# EAGLE board Own_RPi.Streamerboard.pro_v1.1_Final_AR (EAGLE 9.6.2)
REV: B
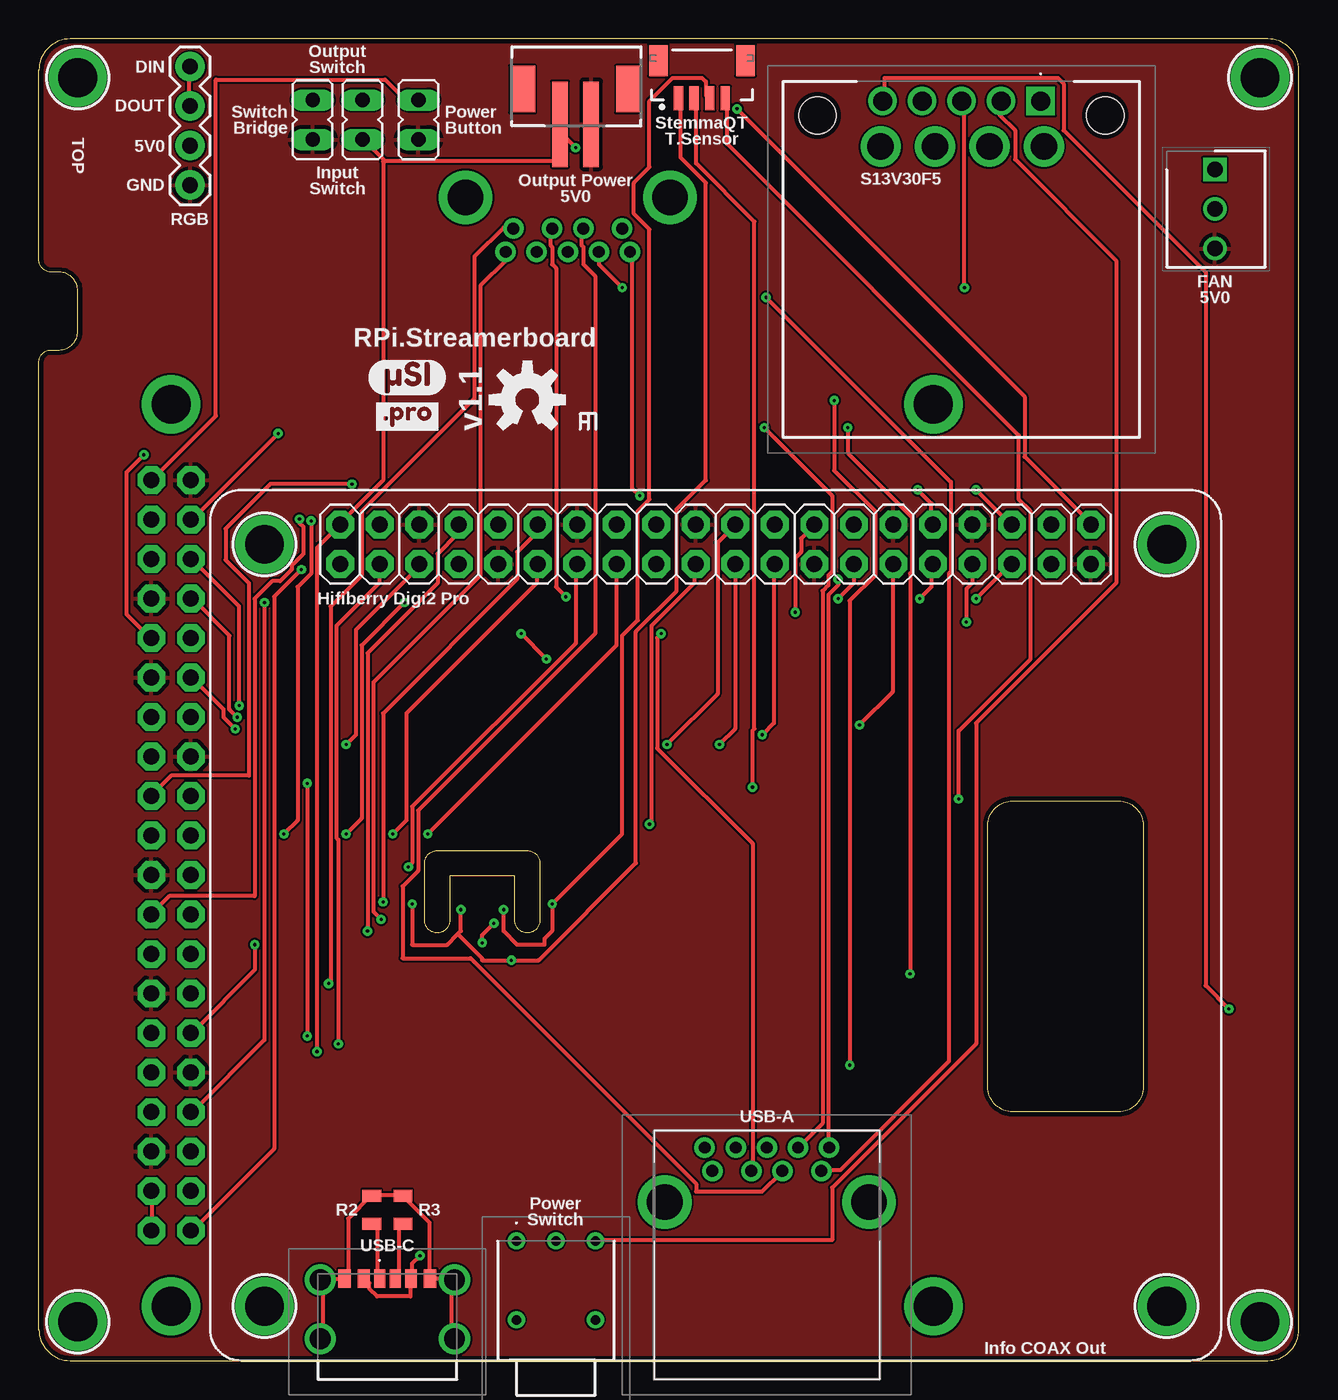
[diagram p0: board, top side]
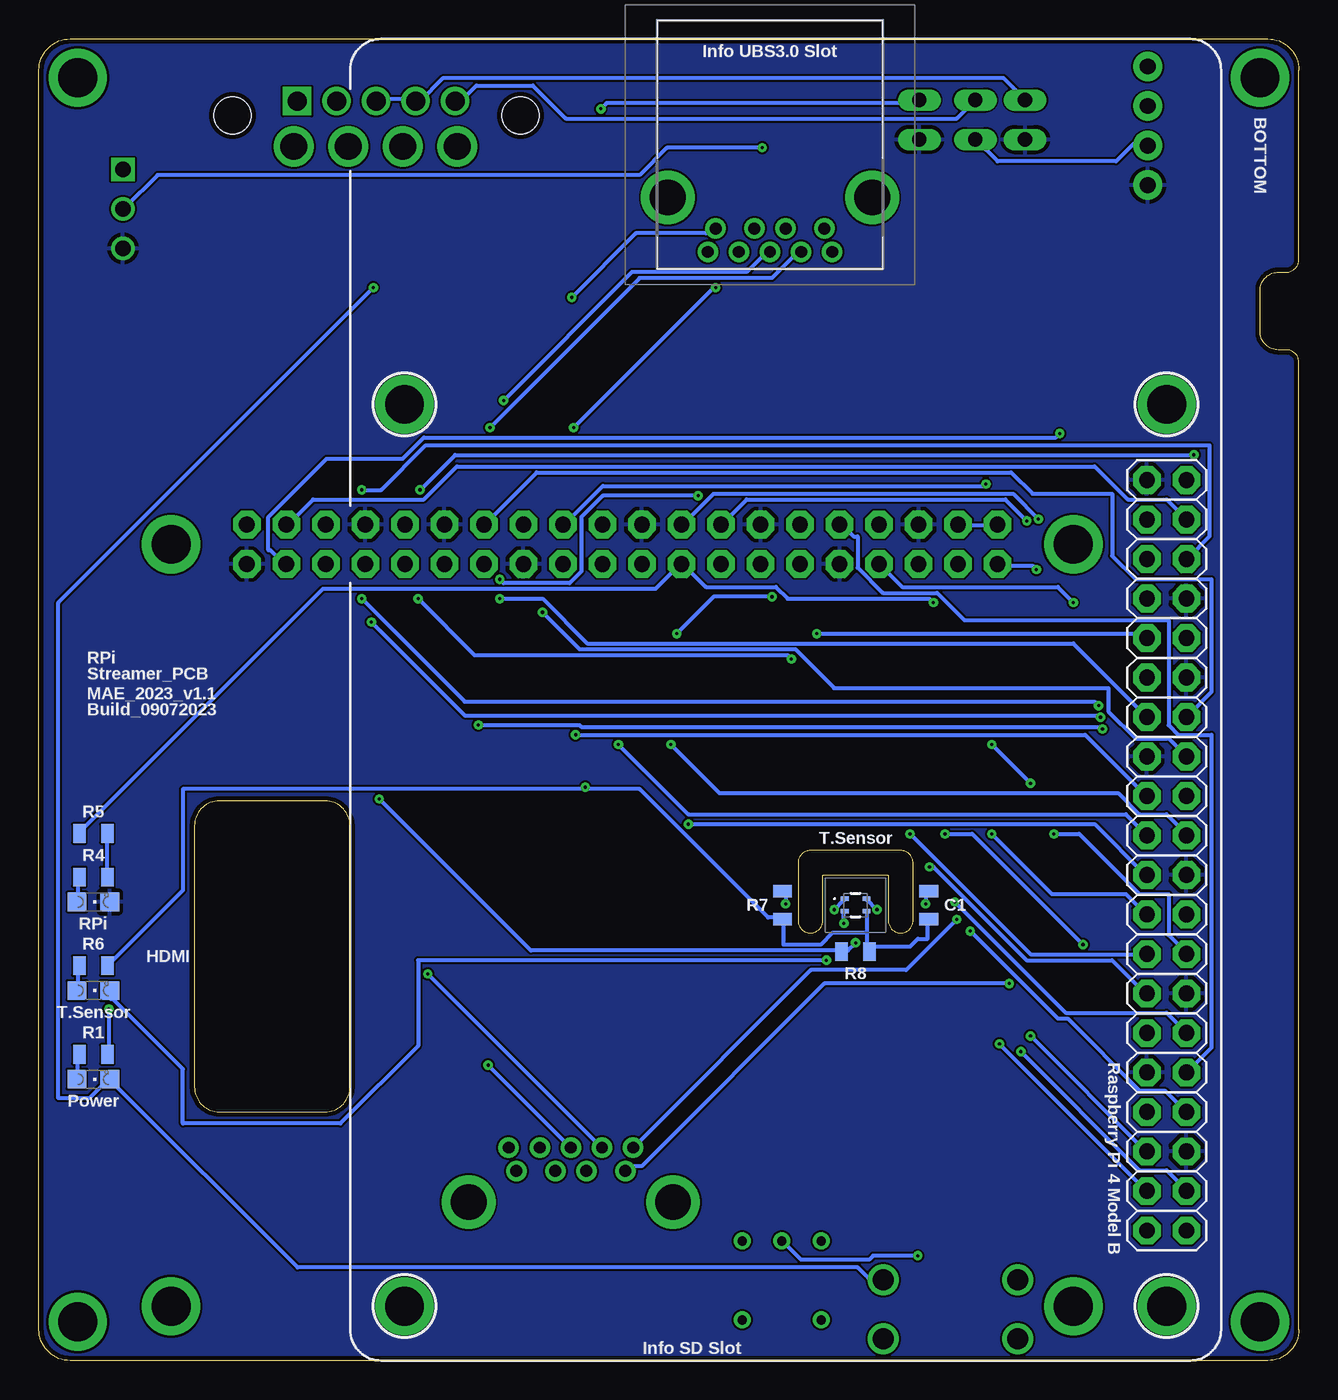
[diagram p1: board, bottom side, seen from below]

Size 81 x 85 mm. Coordinates in mm from the lower left corner, seen from the top.
Outline: 0,70.8 0,70.9 0,83 arc-90 2,85 79,85 arc-90 81,83 81,2 arc-90 79,0 2,0 arc-90 0,2 0,64.2 arc-90 0.8,65 1.3,65 arc90 2.5,66.2 2.5,68.8 arc90 1.3,70 0.8,70 arc-90 0,70.8
Outline: 69.4,16 62.6,16 arc-90 61,17.6 61,34.4 arc-90 62.6,36 69.4,36 arc-90 71,34.4 71,17.6 arc-90 69.4,16
Outline: 26.4,31.2 26.4,28.3 arc-90 25.6,27.5 arc-90 24.8,28.3 24.8,32 arc-90 25.6,32.8 31.4,32.8 arc-90 32.2,32 32.2,28.3 arc-90 31.4,27.5 arc-90 30.6,28.3 30.6,31.2 26.4,31.2
Copper layers (1*16): Top 0.035mm / dielectric 1.5mm / Bottom 0.035mm
Design rules "aisler_2_layer_complex": minimum track width 0.125mm, minimum drill 0.2mm, track to track 0.125mm, track to pad 0.125mm, pad to pad 0.125mm, via to via 0.125mm, smd to smd 0.125mm, copper to edge 0.3mm, drill to drill 0.25mm, minimum pad ring 0.2mm, minimum via ring 0.2mm, stop-mask expansion 0mil, vias tented up to drill 0mil, thermal gap 10mil
Net classes: 0 default: width 0.25 mm

## Footprints (pad centres in the part's own frame; a part is rotated, then mirrored left to right if it is on the bottom)
0805 = smd 0.8 x 1.2: 1 -0.9,0; 2 0.9,0
JST-2-SMD-VERT = smd 1 x 5.5: GND 1,-2; VCC -1,-2 | smd 1.6 x 3: P$1 -3.4,0.27; P$2 3.4,0.27
S13V30F5 = drill 1.22 pad 1.83 square: 1 0,0 | drill 1.22 pad 1.83: 2 2.54,0; 3 5.08,0; 4 7.62,0; 5 10.16,0 | drill 1.72 pad 2.58: 6 -0.21,2.92; 7 3.29,2.92; 8 6.79,2.92; 9 10.29,2.92 | hole 2.38: -4.15,0.93; 14.35,0.93
SHT45AD1BR2 = smd 0.5 x 0.3: 1 -0.7,0.4; 2 -0.7,-0.4; 3 0.7,-0.4; 4 0.7,0.4
USB4125GFA0190 = smd 0.7 x 1.2: A5 -0.5,3.08; B5 0.5,3.08 | smd 0.76 x 1.2: A9 1.52,3.08; B9 -1.52,3.08 | smd 0.8 x 1.2: A12 2.75,3.08; B12 -2.75,3.08 | drill 1.34 pad 2.01: MH1 -4.32,3; MH2 -4.32,-0.8; MH3 4.32,-0.8; MH4 4.32,3
AUY10053 = drill 0.77 pad 1.32: 1 0,0; 2 2,0; 3 4,0; 4 6,0; 5 8,0; 6 0.5,-1.5; 7 3,-1.5; 8 5,-1.5; 9 7.5,-1.5 | drill 2.3 pad 3.45: MH1 -2.57,-3.5; MH2 10.57,-3.5
SHDR3W82P0X254_1X3_747X635X818 = drill 1 pad 1.5 square: 1 0,0 | drill 1 pad 1.5: 2 2.54,0; 3 5.08,0
1X04 = drill 1.016 pad 1.88: 1 0,0; 2 2.54,0; 3 5.08,0; 4 7.62,0
JST04_1MM_VERT = smd 0.6 x 1.55: 1 -1.478,0.775; 2 -0.478,0.775; 3 0.522,0.775; 4 1.522,0.775 | smd 1.2 x 2: NC1 -2.778,3.2; NC2 2.822,3.2
2X20-BIG = drill 1.016 pad 1.778 octagon: 1 -24.13,-1.27; 2 -24.13,1.27; 3 -21.59,-1.27; 4 -21.59,1.27; 5 -19.05,-1.27; 6 -19.05,1.27; 7 -16.51,-1.27; 8 -16.51,1.27; 9 -13.97,-1.27; 10 -13.97,1.27; 11 -11.43,-1.27; 12 -11.43,1.27; 13 -8.89,-1.27; 14 -8.89,1.27; 15 -6.35,-1.27; 16 -6.35,1.27; 17 -3.81,-1.27; 18 -3.81,1.27; 19 -1.27,-1.27; 20 -1.27,1.27; 21 1.27,-1.27; 22 1.27,1.27; 23 3.81,-1.27; 24 3.81,1.27; 25 6.35,-1.27; 26 6.35,1.27; 27 8.89,-1.27; 28 8.89,1.27; 29 11.43,-1.27; 30 11.43,1.27; 31 13.97,-1.27; 32 13.97,1.27; 33 16.51,-1.27; 34 16.51,1.27; 35 19.05,-1.27; 36 19.05,1.27; 37 21.59,-1.27; 38 21.59,1.27; 39 24.13,-1.27; 40 24.13,1.27
JP1 = drill 0.914 long: 1 0,-1.27; 2 0,1.27
CHIPLED_0805 = smd 1.2 x 1.2: A 0,-1.05; C 0,1.05
GW12RHH = drill 0.6 pad 1.1: 4 0,0; 5 2.54,0; 6 5.08,0; MH1 0,-5.08; MH2 5.08,-5.08
MOUNTINGHOLE_2.5_PLATED = drill 2.5 pad 3.2: P$1 0,0

## Placement (x,y rotation side)
C1  0.1uF  [0805]  23.8,29.3 270 bottom
CN1  TinyS3  [JST-2-SMD-VERT]  34.5,81.5 0 top
IC1  S13V30F5  [S13V30F5]  64.4,81 180 top
IC2  SHT45-AD1B-R2  [SHT45AD1BR2]  28.5,29.3 0 bottom
J1  USB4125-GF-A-0190  [USB4125GFA0190]  22.4,2.2 0 top
J2  AU-Y1005-3  [AUY10053]  42.8,13.7 0 top
J3  AU-Y1005-3  [AUY10053]  30,71.3 180 bottom
J4  22-23-2031  [SHDR3W82P0X254_1X3_747X635X818]  75.6,76.6 270 top
J5  RGB  [1X04]  9.72,75.6 90 top
J8  StemmaQT  [JST04_1MM_VERT]  42.6,80.4 0 top
JP1  RPIx  [2X20-BIG]  8.5,32.5 90 bottom
JP2  COAX  [2X20-BIG]  43.5,52.5 0 top
JP3  [JP1]  17.6,79.8 180 top
JP4  [JP1]  20.8,79.8 180 top
JP5  [JP1]  24.4,79.8 0 top
ORANGE1  [CHIPLED_0805]  77.5,18.1 270 bottom
ORANGE2  [CHIPLED_0805]  77.5,23.8 270 bottom
R1  2K8  [0805]  77.5,19.7 180 bottom
R2  5K1  [0805]  21.4,9.7 90 top
R3  5K1  [0805]  23.4,9.7 90 top
R4  0K3  [0805]  77.5,31.1 180 bottom
R5  0K2  [0805]  77.5,33.9 0 bottom
R6  1K1  [0805]  77.5,25.4 180 bottom
R7  10K  [0805]  33.2,29.3 270 bottom
R8  10K  [0805]  28.5,26.3 0 bottom
S1  GW12RHH  [GW12RHH]  30.7,7.7 0 top
U$1  [.PRO_LARGE]  21.7,59.8 0 top
U$2  [OSHW-LOGO-M]  31.4,61.8 0 top
U$3  MOUNTINGHOLE2.5  [MOUNTINGHOLE_2.5_PLATED]  14.5,52.5 0 top
U$5  MOUNTINGHOLE2.5  [MOUNTINGHOLE_2.5_PLATED]  72.5,3.5 0 top
U$8  MOUNTINGHOLE2.5  [MOUNTINGHOLE_2.5_PLATED]  8.5,61.5 0 bottom
U$9  MOUNTINGHOLE2.5  [MOUNTINGHOLE_2.5_PLATED]  8.5,3.5 0 bottom
U$10  MOUNTINGHOLE2.5  [MOUNTINGHOLE_2.5_PLATED]  14.5,3.5 0 top
U$11  MOUNTINGHOLE2.5  [MOUNTINGHOLE_2.5_PLATED]  57.5,3.5 0 bottom
U$12  MOUNTINGHOLE2.5  [MOUNTINGHOLE_2.5_PLATED]  72.5,52.5 0 top
U$13  MOUNTINGHOLE2.5  [MOUNTINGHOLE_2.5_PLATED]  78.5,2.5 0 top
U$14  MOUNTINGHOLE2.5  [MOUNTINGHOLE_2.5_PLATED]  2.5,82.5 0 top
U$15  MOUNTINGHOLE2.5  [MOUNTINGHOLE_2.5_PLATED]  78.5,82.5 0 top
U$16  MOUNTINGHOLE2.5  [MOUNTINGHOLE_2.5_PLATED]  2.5,2.5 0 top
U$17  MOUNTINGHOLE2.5  [MOUNTINGHOLE_2.5_PLATED]  57.5,61.5 0 bottom
U$18  [µSI_LARGE]  21.2,62.1 0 top
WHITE  [CHIPLED_0805]  77.5,29.5 270 bottom

## Library data of the parts
C1 = SparkFun-Capacitors; PROD_ID: CAP-08064
CN1 = SparkFun-Connectors2
IC1 = S13V30F5; DESCRIPTION: 5V Step-Up/Step-Down Voltage Regulator; HEIGHT: 9.57mm; MANUFACTURER_NAME: Pololu; MANUFACTURER_PART_NUMBER: S13V30F5
IC2 = SHT45-AD1B-R2; ARROW_PART_NUMBER: SHT45-AD1B-R2; ARROW_PRICE-STOCK: https://www.arrow.com/en/products/sht45-ad1b-r2/sensirion-ag?region=nac; DESCRIPTION: 4 4th Generation, High-Accuracy, Ultra-Low-Power, 16-bit Relative Humidity and Temperature Sensor; HEIGHT: 0.59mm; MANUFACTURER_NAME: Sensirion; MANUFACTURER_PART_NUMBER: SHT45-AD1B-R2; MOUSER_PART_NUMBER: 403-SHT45-AD1B-R2; MOUSER_PRICE-STOCK: https://www.mouser.co.uk/ProductDetail/Sensirion/SHT45-AD1B-R2?qs=Znm5pLBrcAImXcmTJwn%2FTg%3D%3D
J1 = USB4125-GF-A-0190; DESCRIPTION: USB Connectors USB C Rec GF RA 6P SMT TH Stakes 1.9mm; HEIGHT: 3.41mm; MANUFACTURER_NAME: GCT (GLOBAL CONNECTOR TECHNOLOGY); MANUFACTURER_PART_NUMBER: USB4125-GF-A-0190; MOUSER_PART_NUMBER: 640-USB4125-GF-A-190; MOUSER_PRICE-STOCK: https://www.mouser.co.uk/ProductDetail/GCT/USB4125-GF-A-0190?qs=QNEnbhJQKvbCz4hEJBS24w%3D%3D
J2 J3 = AU-Y1005-3; ARROW_PART_NUMBER: AU-Y1005-3; ARROW_PRICE-STOCK: https://www.arrow.com/en/products/au-y1005-3/assmann-wsw-components-inc?region=nac; DESCRIPTION: CONN USB 3.0 R/A FMAL TYPE-A PCB; HEIGHT: 7.2mm; MANUFACTURER_NAME: ASSMANN WSW components GmbH; MANUFACTURER_PART_NUMBER: AU-Y1005-3
J4 = 22-23-2031; DESCRIPTION: 2.54mm,header,KK,vert,Sn,frictn lock,3w Molex KK 254 Series, Series Number 6373, 2.54mm Pitch 3 Way 1 Row Straight PCB Header, Through Hole, Solder Termination; HEIGHT: 8.18mm; MANUFACTURER_NAME: Molex; MANUFACTURER_PART_NUMBER: 22-23-2031; MOUSER_PART_NUMBER: 538-22-23-2031; MOUSER_PRICE-STOCK: https://www.mouser.co.uk/ProductDetail/Molex/22-23-2031?qs=ILqg114nvd41XyIAFDpXfw%3D%3D
J5 = SparkFun-Connectors2; PROD_ID: CONN-09696
J8 = SparkFun-Connectors2; PROD_ID: CONN-14483
JP1 JP2 ORANGE1 ORANGE2 WHITE = adafruit
JP3-JP5 = jumper
R1-R8 = SparkFun-Resistors
S1 = GW12RHH; ARROW_PART_NUMBER: GW12RHH; ARROW_PRICE-STOCK: https://www.arrow.com/en/products/gw12rhh/nkk-switches?region=nac; DESCRIPTION: NKK SWITCHES - GW12RHH - Rocker Switch, On-None-On, SPDT, Non Illuminated, Through Hole, Grey, GW Series; HEIGHT: 5.4mm; MANUFACTURER_NAME: NKK Switches; MANUFACTURER_PART_NUMBER: GW12RHH; MOUSER_PART_NUMBER: 633-GW12RHH; MOUSER_PRICE-STOCK: https://www.mouser.co.uk/ProductDetail/NKK-Switches/GW12RHH?qs=4EnmSMTL3HPCG3meE6aDvQ%3D%3D
U$1 U$18 = own_Label_PCB
U$2 = SparkFun-Aesthetics
U$3 U$5 U$8-U$17 = microbuilder; BOM: EXCLUDE

## Nets
3V3: JP1.18 JP2.17 R5.1
DIN_DOUT: J5.3 J5.4
EN: IC1.1
GND: IC1.3 IC1.4 J1.A12 J1.B12 J1.MH1 J1.MH2 J1.MH3 J1.MH4 JP3.1 ORANGE1.C R2.2 R3.2
N$1: ORANGE1.A R1.2
N$2: R4.1 R5.2
N$3: J1.B5 R3.1
N$4: J1.A5 R2.1
N$5: J2.4 J3.4
N$6: ORANGE2.A R6.2
N$7: R4.2 WHITE.A
N$10: C1.2 IC2.3 J8.2 R6.1 R7.2 R8.2
N$13: C1.1 IC2.4 J8.1 ORANGE2.C
N$14: IC2.2 J8.4 R8.1
N$15: J2.6 J3.6
N$16: IC2.1 J8.3 R7.1
N$17: J2.5 J3.5
N$19: J2.3 J3.3
N$20: J2.2 J3.2
N$21: J2.1 J3.1
N$22: J2.9 J3.9
N$23: J2.8 J3.8
N$24: J2.7 J3.7
PIN1: JP1.2 JP2.1
PIN3: JP1.4 JP2.3
PIN5: JP1.6 JP2.5
PIN7: JP1.8 JP2.7
PIN8: JP1.7 JP2.8
PIN10: JP1.9 JP2.10
PIN11: JP1.12 JP2.11
PIN12: JP1.11 JP2.12
PIN13: JP1.14 JP2.13
PIN15: JP1.16 JP2.15
PIN16: JP1.15 JP2.16
PIN18: JP1.17 JP2.18
PIN19: JP1.20 JP2.19
PIN21: JP1.22 JP2.21
PIN22: JP1.21 JP2.22
PIN23: JP1.24 JP2.23
PIN24: JP1.23 JP2.24
PIN26: JP1.25 JP2.26
PIN27: JP1.28 JP2.27
PIN28: JP1.27 JP2.28
PIN29: JP1.30 JP2.29
PIN31: JP1.32 JP2.31
PIN32: JP1.31 JP2.32
PIN33: JP1.34 JP2.33
PIN35: JP1.36 JP2.35
PIN36: JP1.35 JP2.36
PIN37: JP1.38 JP2.37
PIN38: JP1.37 JP2.38
PIN40: JP1.39 JP2.40 JP5.2
USB_5V0: CN1.VCC J4.2 J5.2 JP1.1 JP1.3 JP2.2 JP2.4 JP4.2
USB_GND: CN1.GND J4.3 J5.1 JP1.5 JP1.10 JP1.13 JP1.19 JP1.26 JP1.29 JP1.33 JP1.40 JP2.6 JP2.9 JP2.14 JP2.20 JP2.25 JP2.30 JP2.34 JP2.39 JP3.2 JP5.1 WHITE.C
VBUS_VIN: J1.A9 J1.B9 S1.5
VIN: IC1.2 S1.6
VOUT: IC1.5 JP4.1 R1.1

## Tracks (layer width: path | path; a pad name or v marks a point on that pad's centre or on a via)
3V3  (via drill 0.2)
  Top 0.25: v19.75,33.88 20.75,34.88 20.75,46 v23.5,48.75
  Bottom 0.25: R5.1 78.38,34 62.75,49.62 41.38,49.62 39.88,51.12 39.75,51.12 JP2.17 39.62,51.12 39.5,51.12 38.12,49.75 33.62,49.75 32.88,49 23.75,49 v23.5,48.75 | v19.75,33.88 15.88,30 11.12,30 9.88,28.75 JP1.18
DIN_DOUT
  Top 0.25: J5.3 9.62,80.75 9.62,83.12 J5.4
GND  (via drill 0.2)
  Top 0.25: 18.25,5.25 18.12,5.25 J1.MH1 18.25,5.25 | 18.25,5.25 19.62,5.25 J1.B12 19.75,5.38 19.88,5.5 19.88,9.12 21.38,10.62 R2.2 21.5,10.62 23.38,10.62 R3.2 25.12,8.88 25.12,5.38 J1.A12 25.25,5.25 26.5,5.25 | 18.25,5.25 18.25,1.62 18.12,1.5 J1.MH2 | 26.5,5.25 26.62,5.25 J1.MH4 26.5,5.25 | 26.5,5.25 26.5,1.62 26.62,1.5 J1.MH3 | v59.5,69 59.5,80.88 59.38,81 IC1.3
  Bottom 0.25: JP3.1 17.62,81.12 19,82.5 55,82.5 56.5,81 IC1.4 56.5,81.12 59.12,81.12 59.25,81 IC1.3 | J1.MH4 26.75,5.25 27.62,5.25 28.38,6 64.38,6 76.38,18 ORANGE1.C 76.5,18 76.62,18 77.75,16.88 79.75,16.88 79.75,48.75 v59.5,69
N$1
  Bottom 0.25: R1.2 78.5,19.62 78.5,18.12 ORANGE1.A
N$2
  Bottom 0.25: R4.1 76.62,31.12 76.62,33.88 R5.2
N$3
  Top 0.25: J1.B5 23,5.38 23.12,5.5 23.12,8.5 23.38,8.75 R3.1
N$4
  Top 0.25: J1.A5 21.88,5.38 21.75,5.5 21.75,8.5 21.5,8.75 R2.1
N$5  (via drill 0.2)
  Top 0.25: v46.62,60 51,55.62 51,50.75 50.75,50.5 50.75,49.88 50.38,49.5 50.38,15.25 48.88,13.75 J2.4 | v37.5,69 36,70.5 J3.4
  Bottom 0.25: v46.62,60 37.62,69 v37.5,69
N$6
  Bottom 0.25: ORANGE2.A 78.5,23.88 78.5,25.38 R6.2
N$7
  Bottom 0.25: WHITE.A 78.5,29.5 78.5,31 R4.2
N$10  (via drill 0.2)
  Top 0.25: v45.88,36.88 45.88,40.5 46,40.62 46,73.25 42.25,77 42.25,81 42.12,81.12 J8.2
  Bottom 0.25: 27.75,26.62 27.75,26.38 27.62,26.38 R8.2 27.75,26.62 | 27.75,26.62 27.75,27.5 | 27.75,27.5 27.75,28.88 IC2.3 | 27.75,26.62 25,26.62 24.5,27.12 23.88,27.12 23.88,28.38 C1.2 | 27.75,27.5 30,27.5 30.75,26.75 33.12,26.75 33.12,28.38 R7.2 33.25,28.5 34.12,28.5 42.38,36.75 45.88,36.75 | R6.1 71.75,30.25 71.75,36.75 45.88,36.75 | 45.88,36.75 v45.88,36.88
N$13  (via drill 0.2)
  Top 0.25: v27.12,29 27.12,27.62 26.94,27.44 | 26.94,27.44 26.25,26.75 24,26.75 v24,29.38 | 26.94,27.44 28.5,25.88 28.5,25.75 v30.38,25.75 32.12,25.75 38.38,32 38.38,46.88 41,49.5 41,54.75 42.88,56.62 42.88,75.75 41.25,77.38 41.25,81 41.12,81.12 J8.1
  Bottom 0.25: v27.12,29 27.75,29.62 IC2.4 | v24,29.38 24,30.12 23.88,30.12 C1.1 | v30.38,25.75 56.62,25.75 56.62,20.25 61.62,15.25 71.75,15.25 71.75,18.75 76.25,23.25 76.38,23.25 76.38,23.75 ORANGE2.C
N$14  (via drill 0.2)
  Top 0.25: v29.25,28.12 28.5,27.38 v28.5,26.88 | v59.12,36.12 59.12,40.5 63.75,45.12 63.75,54.62 63,55.38 63,59.5 44.25,78.25 44.25,81 44.12,81.12 J8.4
  Bottom 0.25: v29.25,28.12 29.25,28.88 IC2.2 | v28.5,26.88 29,26.38 29.38,26.38 R8.1 29.5,26.38 49.38,26.38 v59.12,36.12
N$15  (via drill 0.2)
  Top 0.25: v18.62,24.25 18.75,24.38 18.75,48.5 20.75,50.5 20.75,54.62 28,61.88 28,71 29.88,72.88 30.5,72.88 J3.6
  Bottom 0.25: J2.6 43,12.5 42.25,12.5 30.5,24.25 v18.62,24.25
N$16  (via drill 0.2)
  Top 0.25: v29.88,29 29.88,27.62 30.75,26.75 32.5,26.75 32.5,27.12 33,27.62 v33,29.38 37.5,33.88 37.5,46.62 38.5,47.62 38.5,54.62 39.25,55.38 39.25,72.75 38.25,73.75 38.25,75.75 39.25,76.75 39.25,81 40.75,82.5 42.62,82.5 42.88,82.25 42.88,81.38 43,81.25 J8.3
  Bottom 0.25: v29.88,29 29.25,29.62 IC2.1 | v33,29.38 33,30.12 33.12,30.12 R7.1
N$17  (via drill 0.2)
  Top 0.25: v51.38,50.25 51.38,49.88 50.75,49.25 50.75,13.75 J2.5 | v38.62,55.62 38.12,56.12 38.12,71.12 38,71.25 J3.5
  Bottom 0.25: v51.38,50.25 51.12,50 46.88,50 46.12,50.75 46.12,54.25 44.75,55.62 v38.62,55.62
N$19  (via drill 0.2)
  Top 0.25: v52.12,19 52.12,48.88 53.75,50.5 53.75,54.62 51.12,57.25 v51.12,61.75
  Bottom 0.25: v52.12,19 46.88,13.75 J2.3 | v51.12,61.75 42.88,70 35.5,70 34.25,71.25 34,71.25 J3.3
N$20  (via drill 0.2)
  Top 0.25: v56,24.88 56,50.62 56.12,50.75 56.12,54.25 52,58.38 v52,60
  Bottom 0.25: v56,24.88 44.88,13.75 J2.2 | v52,60 42.38,69.62 33.88,69.62 32.25,71.25 32,71.25 J3.2
N$21  (via drill 0.2)
  Top 0.25: v22,28.38 21.5,28.88 21.5,43.62 28.38,50.5 28.38,69.12 30,70.75 J3.1
  Bottom 0.25: J2.1 31.38,25.12 25.25,25.12 v22,28.38
N$22  (via drill 0.2)
  Top 0.25: v46.75,68.38 58.62,56.5 58.62,50.75 58.5,50.62 58.5,19.25 51.5,12.25 50.38,12.25 J2.9
  Bottom 0.25: v46.75,68.38 42.62,72.5 38.12,72.5 37.88,72.75 37.5,72.75 J3.9
N$23
  Top 0.25: J2.8 47.75,12.12 46.5,10.88 42.25,10.88 42.25,11.38 27.75,25.88 23.38,25.88 23.38,30.5 24.38,31.5 24.38,35.38 35.75,46.75 35.75,69.75 35,70.5 35,71.62 34.88,71.75 34.88,72.62 35,72.75 J3.8
N$24  (via drill 0.2)
  Top 0.25: v40,46.75 39.75,46.5 39.75,39.38 45.88,33.25 45.88,12.25 J2.7 | v33.88,49.12 33.25,49.75 33.25,70.25 33,70.5 33,71.62 32.88,71.75 32.88,72.62 33,72.75 J3.7
  Bottom 0.25: v40,46.75 37.62,49.12 v33.88,49.12
PIN1  (via drill 0.2)
  Top 0.25: v16.88,50.88 15.12,49.12 15.12,13.62 9.88,8.38 JP1.2
  Bottom 0.25: v16.88,50.88 17.12,51.12 19.25,51.12 JP2.1
PIN3  (via drill 0.2)
  Top 0.25: v19.25,20.38 19.25,33.5 19.12,33.62 19.12,47.25 21.88,50 21.88,51.12 JP2.3
  Bottom 0.25: v19.25,20.38 9.88,11 JP1.4
PIN5  (via drill 0.2)
  Top 0.25: v17.25,37.12 v17.25,20.88 | v19.75,39.62 20.38,40.25 20.38,47 24.38,51 24.38,51.12 JP2.5
  Bottom 0.25: v17.25,20.88 9.88,13.5 JP1.6 | v19.75,39.62 v17.25,37.12
PIN7  (via drill 0.2)
  Top 0.25: v14.5,48.75 14.5,20.62 9.88,16 JP1.8
  Bottom 0.25: v14.5,48.75 15.5,49.75 25.5,49.75 26.88,51.12 JP2.7
PIN8  (via drill 0.2)
  Top 0.25: v21.12,27.62 21.12,45.5 25.62,50 25.62,51.88 26.88,53.12 26.88,53.75 JP2.8
  Bottom 0.25: v21.12,27.62 15.5,22 14.88,22 10.25,17.38 8.62,17.38 7.25,16 JP1.7
PIN10
  Bottom 0.25: JP1.9 7.12,18.62 5.62,20.12 5.62,40.25 7.75,40.25 8.38,40.88 8.38,47.62 21.5,47.62 23.25,49.38 26.75,49.38 28.38,51 28.38,53 28.62,53 29.38,53.75 29.5,53.75 JP2.10
PIN11  (via drill 0.2)
  Top 0.25: v13.88,26.75 13.88,25.12 9.88,21.12 JP1.12 | v22.75,33.88 23.62,34.75 23.62,41.62 32,50 32,51.12 JP2.11
  Bottom 0.25: v13.88,26.75 21,33.88 v22.75,33.88
PIN12  (via drill 0.2)
  Top 0.25: v22.12,29.5 22.12,41.62 30.75,50.25 30.75,52 32,53.25 32,53.75 JP2.12
  Bottom 0.25: v22.12,29.5 15,22.38 8.5,22.38 7.25,21.12 JP1.11
PIN13  (via drill 0.2)
  Top 0.25: v23.75,31.75 24,32 24,35.62 34.5,46.12 34.5,51.12 JP2.13
  Bottom 0.25: v23.75,31.75 23.5,31.75 17.5,25.75 12,25.75 9.88,23.62 JP1.14
PIN15  (via drill 0.2)
  Top 0.25: v25,33.88 37.12,46 37.12,51.12 JP2.15
  Bottom 0.25: v25,33.88 17.25,26.12 9.88,26.12 JP1.16
PIN16  (via drill 0.2)
  Top 0.25: v15.75,33.88 16.62,34.75 16.62,49.75 17.5,50.62 v17.5,54
  Bottom 0.25: v15.75,33.88 14.12,33.88 10.25,30 8.38,30 8.38,27.38 7.25,26.25 JP1.15 | v17.5,54 18.88,55.38 35.5,55.38 37,53.88 37.12,53.88 JP2.16
PIN18  (via drill 0.2)
  Top 0.25: v16.75,54.12 16.75,53.88 17,53.62 17,51.88 16.25,51.12 16.25,50.88 15.5,50.12 15,50.12 13.88,49 13.88,29.88 8.38,29.88 7.25,28.75 JP1.17
  Bottom 0.25: v16.75,54.12 18.38,55.75 37.62,55.75 39.5,53.88 39.62,53.88 JP2.18
PIN19  (via drill 0.2)
  Top 0.25: v39.25,34.5 39.38,34.62 39.38,47.25 42.12,50 42.12,51.12 JP2.19
  Bottom 0.25: v39.25,34.5 13.12,34.5 9.88,31.25 JP1.20
PIN21  (via drill 0.2)
  Top 0.25: v43.75,39.62 44.75,40.62 44.75,51.12 JP2.21
  Bottom 0.25: JP1.22 11.12,35.12 39.25,35.12 v43.75,39.62
PIN22  (via drill 0.2)
  Top 0.25: v40.38,39.62 43.62,42.88 43.62,52.62 JP2.22
  Bottom 0.25: v40.38,39.62 37.25,36.5 11.62,36.5 10.25,35.12 8.5,35.12 7.25,33.88 JP1.21
PIN23  (via drill 0.2)
  Top 0.25: v46.5,40.25 47.25,41 47.25,51.12 JP2.23
  Bottom 0.25: v46.5,40.25 13.75,40.25 9.88,36.38 JP1.24
PIN24  (via drill 0.2)
  Top 0.25: v20.12,56.38 14.88,56.38 12,53.5 12,51.5 13.5,50 13.5,37.62 8.5,37.62 7.25,36.38 JP1.23
  Bottom 0.25: v20.12,56.38 20.25,56.25 44.75,56.25 47.12,53.88 47.25,53.88 JP2.24
PIN26  (via drill 0.2)
  Top 0.25: v48.62,48.12 48.62,51.62 49,52 49,52.88 49.75,53.62 49.75,53.75 JP2.26
  Bottom 0.25: v48.62,48.12 46.25,45.75 32.38,45.75 29.88,43.25 12.25,43.25 12.25,41.75 10.5,40 8.38,40 7.25,38.88 JP1.25
PIN27  (via drill 0.2)
  Top 0.25: v51.38,49 52.38,50 52.38,51.12 JP2.27
  Bottom 0.25: v51.38,49 48.62,49 45.75,46.12 14.5,46.12 9.88,41.5 JP1.28
PIN28
  Bottom 0.25: JP1.27 7.12,41.5 5.62,43 5.62,50.25 10.5,50.25 12,51.75 12,55.75 17.12,55.75 18.5,57.12 49,57.12 52.25,53.88 52.38,53.88 JP2.28
PIN29  (via drill 0.2)
  Top 0.25: v12.62,40.62 11.88,41.38 11.88,41.88 9.88,43.88 JP1.30 | v52.75,40.88 54.88,43 54.88,51.12 JP2.29
  Bottom 0.25: v12.62,40.62 12.75,40.75 46.12,40.75 46.25,40.88 v52.75,40.88
PIN31  (via drill 0.2)
  Top 0.25: v32.62,45.12 v31,46.75 | v56.62,49 57.38,49.75 57.38,51.12 JP2.31
  Bottom 0.25: v31,46.75 10.12,46.75 9.88,46.5 JP1.32 | v32.62,45.12 32.88,45.38 53,45.38 v56.62,49
PIN32  (via drill 0.2)
  Top 0.25: v6.75,58.25 5.62,57.12 5.62,48 7.12,46.5 JP1.31 | v56.5,56 57.38,55.12 57.38,53.88 JP2.32
  Bottom 0.25: v6.75,58.25 54.25,58.25 v56.5,56
PIN33  (via drill 0.2)
  Top 0.25: v12.75,41.38 12.25,41.88 12.25,46.62 9.88,49 JP1.34 | v59.62,47.5 59.62,49.62 60,50 60,51.12 JP2.33
  Bottom 0.25: v12.75,41.38 12.88,41.5 53.62,41.5 v59.62,47.5
PIN35  (via drill 0.2)
  Top 0.25: v12.88,42.12 12.88,48.5 9.88,51.5 JP1.36 | v60.25,49 62.5,51.25 JP2.35
  Bottom 0.25: v12.88,42.12 13.12,42.38 53.62,42.38 v60.25,49
PIN36  (via drill 0.2)
  Top 0.25: v60.25,56 62.5,53.75 JP2.36
  Bottom 0.25: v60.25,56 59,56 56.12,58.88 5.75,58.88 5.75,53 7.12,51.62 JP1.35
PIN37  (via drill 0.2)
  Top 0.25: v15.38,59.62 9.88,54.12 JP1.38
  Bottom 0.25: v15.38,59.62 15.62,59.38 56.25,59.38 57.62,58 62.5,58 66.25,54.25 66.25,52.12 66.12,52.12 65.25,51.25 65.12,51.25 JP2.37
PIN38
  Bottom 0.25: JP1.37 7.25,54.12 8.5,55.38 11,55.38 13.12,57.5 54.12,57.5 56.25,55.38 63.38,55.38 64.88,53.88 65,53.88 JP2.38
PIN40  (via drill 0.2)
  Top 0.25: JP5.2 24.38,81.12 23.25,81.12 23.25,81.38 22.25,82.38 11.38,82.38 11.38,60.75 7.25,56.62 JP1.39 | v44.88,80.5 63.38,62 63.38,58.12 67.62,53.88 JP2.40
  Bottom 0.25: v44.88,80.5 44.5,80.88 25.75,80.88 25.62,81 24.5,81 JP5.2
USB_5V0  (via drill 0.2)
  Top 0.25: JP1.1 7.25,8.38 7.25,10.88 JP1.3 | v17.88,19.88 17.88,52.25 19.25,53.62 19.25,53.75 JP2.2 19.38,53.88 22.12,56.62 22.12,77.12 22.19,77.19 | v34.5,78 33.5,79 CN1.VCC 33.5,77.12 22.25,77.12 22.19,77.19 | 22.19,77.19 20.88,78.5 JP4.2
  Bottom 0.25: JP2.2 19.38,53.75 21.88,53.75 JP2.4 | v17.88,19.88 10.25,12.25 8.5,12.25 7.25,11 JP1.3 | JP4.2 20.75,78.5 19.38,77.12 11.75,77.12 10.62,78.25 9.75,78.25 J5.2 | v34.5,78 40.62,78 42.38,76.25 73.38,76.25 75.5,74.12 J4.2
USB_GND
  pour Top: 0,85 0,0 81,0 81,85
  pour Bottom: 0,85 0,0 81,0 81,85
VBUS_VIN  (via drill 0.2)
  Top 0.25: J1.B9 21,5.25 21.25,5 21.25,4.62 21.75,4.12 23.88,4.12 23.88,5.25 J1.A9 24,5.38 24,6.25 v24.5,6.75
  Bottom 0.25: v24.5,6.75 27.38,6.75 27.62,6.5 32,6.5 33.12,7.62 S1.5
VIN
  Top 0.25: S1.6 35.88,7.75 51,7.75 51,11.12 60.25,20.38 60.25,41 69.25,50 69.25,70.75 62.75,77.25 62.75,79.12 61.75,80.12 61.75,81 IC1.2
VOUT  (via drill 0.2)
  Top 0.25: v76.5,22.62 75,24.12 75,70 65.88,79.12 65.88,82.12 65.5,82.5 54.38,82.5 54.38,81.12 IC1.5
  Bottom 0.25: v76.5,22.62 76.5,19.75 R1.1 | IC1.5 53.88,81 52.88,82 49.25,82 47.12,79.88 22,79.88 20.88,81 JP4.1

## Text on the board
tPlace: DIN | Output / Switch | DOUT | Switch / Bridge | Power / Button | StemmaQT / T.Sensor | TOP | 5V0 | Input / Switch | GND | Output Power / 5V0 | S13V30F5 | RGB | FAN / 5V0 | RPi.Streamerboard | v1.1 | Hifiberry Digi2 Pro | USB-A | R2 | R3 | Power / Switch | USB-C | Info COAX Out
bPlace: Info UBS3.0 Slot | BOTTOM | RPi / Streamer_PCB | MAE_2023_v1.1 / Build_09072023 | R5 | T.Sensor | R4 | C1 | R7 | RPi | HDMI | R6 | R8 | T.Sensor | R1 | Power | Raspberry Pi 4 Model B | Info SD Slot